# EAGLE board 2364_ROM-el_v2 (EAGLE 7.7.0)
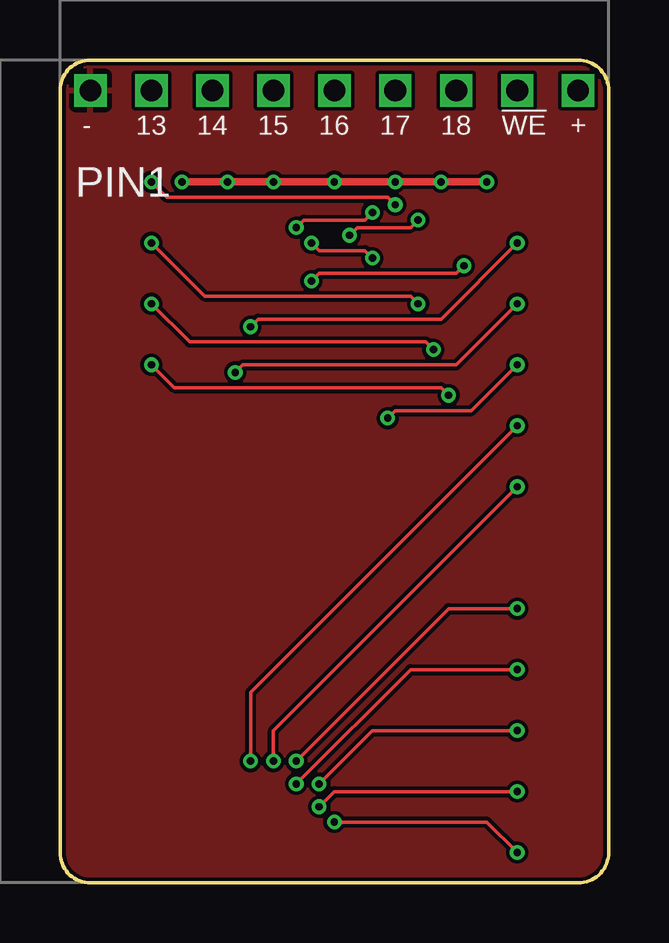
[diagram p0: board, top side]
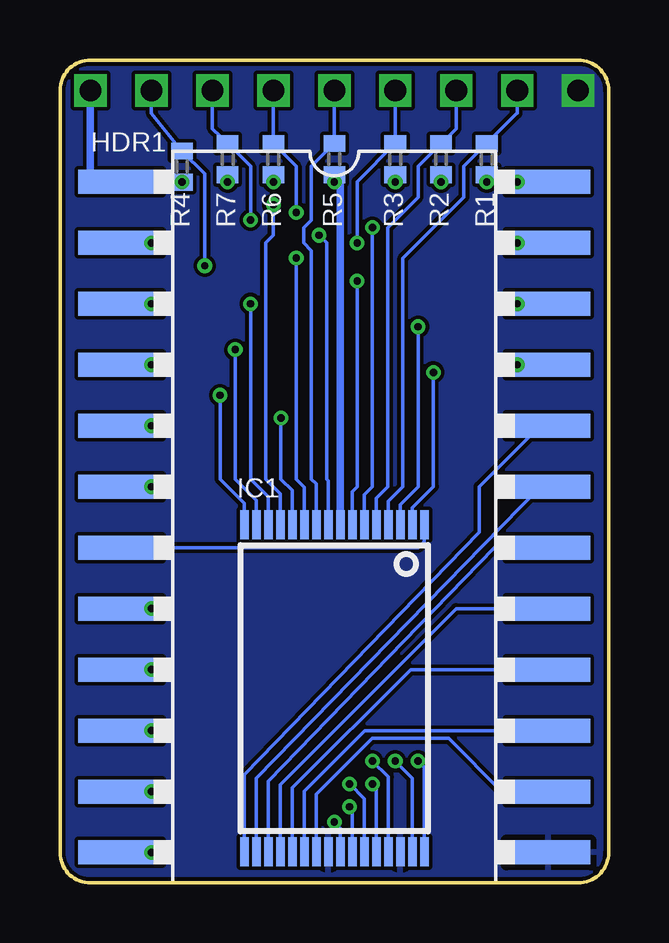
[diagram p1: board, bottom side, seen from below]

Size 22.86 x 34.29 mm. Coordinates in mm from the lower left corner, seen from the top.
Outline: 0,33.02 0,1.27 arc90 1.27,0 21.59,0 arc90 22.86,1.27 22.86,33.02 arc90 21.59,34.29 1.27,34.29 arc90 0,33.02
Copper layers (1*16): Top 0.035mm / dielectric 1.5mm / Bottom 0.035mm
Design rules "hackvana": minimum track width 6mil, minimum drill 0.3mm, track to track 6mil, track to pad 6mil, pad to pad 6mil, via to via 6mil, smd to smd 0mil, copper to edge 6mil, drill to drill 6mil, minimum pad ring 10mil, minimum via ring 6mil, stop-mask expansion 2mil, vias tented up to drill 100mil, thermal gap 10mil

## Footprints (pad centres in the part's own frame; a part is rotated, then mirrored left to right if it is on the bottom)
TP13SQ = smd 1.3 x 1.3: TP 0,0
DIL24-SMD-REVERSE = smd 1 x 3.5 bottom: 1 -13.97,-8.92; 2 -11.43,-8.92; 3 -8.89,-8.92; 4 -6.35,-8.92; 5 -3.81,-8.92; 6 -1.27,-8.92; 7 1.27,-8.92; 8 3.81,-8.92; 9 6.35,-8.92; 10 8.89,-8.92; 11 11.43,-8.92; 12 13.97,-8.92; 13 13.97,8.92; 14 11.43,8.92; 15 8.89,8.92; 16 6.35,8.92; 17 3.81,8.92; 18 1.27,8.92; 19 -1.27,8.92; 20 -3.81,8.92; 21 -6.35,8.92; 22 -8.89,8.92; 23 -11.43,8.92; 24 -13.97,8.92
VSOP32 = smd 1.2 x 0.36: 1 -7.31,3.75; 2 -7.31,3.25; 3 -7.31,2.75; 4 -7.31,2.25; 5 -7.31,1.75; 6 -7.31,1.25; 7 -7.31,0.75; 8 -7.31,0.25; 9 -7.31,-0.25; 10 -7.31,-0.75; 11 -7.31,-1.25; 12 -7.31,-1.75; 13 -7.31,-2.25; 14 -7.31,-2.75; 15 -7.31,-3.25; 16 -7.31,-3.75; 17 6.322,-3.75; 18 6.322,-3.25; 19 6.322,-2.75; 20 6.322,-2.25; 21 6.322,-1.75; 22 6.322,-1.25; 23 6.322,-0.75; 24 6.322,-0.25; 25 6.322,0.25; 26 6.322,0.75; 27 6.322,1.25; 28 6.322,1.75; 29 6.322,2.25; 30 6.322,2.75; 31 6.322,3.25; 32 6.322,3.75
R0402 = smd 0.7 x 0.9: 1 -0.65,0; 2 0.65,0

## Placement (x,y rotation side)
13  TPTP13SQ  [TP13SQ]  3.81,33.02 0 top
14  TPTP13SQ  [TP13SQ]  6.35,33.02 0 top
15  TPTP13SQ  [TP13SQ]  8.89,33.02 0 top
16  TPTP13SQ  [TP13SQ]  11.43,33.02 0 top
17  TPTP13SQ  [TP13SQ]  13.97,33.02 0 top
18  TPTP13SQ  [TP13SQ]  16.51,33.02 0 top
!WE  TPTP13SQ  [TP13SQ]  19.05,33.02 0 top
+  TPTP13SQ  [TP13SQ]  21.59,33.02 0 top
-  TPTP13SQ  [TP13SQ]  1.27,33.02 0 top
HDR1  2364-SB  [DIL24-SMD-REVERSE]  11.43,15.24 270 top
IC1  [VSOP32]  11.43,7.62 270 bottom
R1  [R0402]  5.08,30.16 270 bottom
R2  [R0402]  6.99,30.16 270 bottom
R3  [R0402]  8.89,30.16 270 bottom
R4  [R0402]  17.78,29.84 270 bottom
R5  [R0402]  11.43,30.16 270 bottom
R6  [R0402]  13.97,30.16 270 bottom
R7  [R0402]  15.88,30.16 270 bottom

## Library data of the parts
13-18 !WE + - = testpad
HDR1 = commodore
IC1 = memory-jedec
R1-R7 = resistor

## Nets
!WE: !WE.TP IC1.7 R4.1
A0: HDR1.8 IC1.20
A1: HDR1.7 IC1.19
A2: HDR1.6 IC1.18
A3: HDR1.5 IC1.17
A4: HDR1.4 IC1.16
A5: HDR1.3 IC1.15
A6: HDR1.2 IC1.14
A7: HDR1.1 IC1.13
A8: HDR1.23 IC1.3
A9: HDR1.22 IC1.2
A10: HDR1.19 IC1.31
A11: HDR1.18 IC1.1
A12: HDR1.21 IC1.12
A13: 13.TP IC1.4 R1.1
A14: 14.TP IC1.5 R2.1
A15: 15.TP IC1.11 R3.1
A16: 16.TP IC1.10 R5.1
A17: 17.TP IC1.6 R6.1
A18: 18.TP IC1.9 R7.1
D0: HDR1.9 IC1.21
D1: HDR1.10 IC1.22
D2: HDR1.11 IC1.23
D3: HDR1.13 IC1.25
D4: HDR1.14 IC1.26
D5: HDR1.15 IC1.27
D6: HDR1.16 IC1.28
D7: HDR1.17 IC1.29
GND: -.TP HDR1.12 IC1.24 IC1.30
N$1: HDR1.20 IC1.32
VCC: +.TP HDR1.24 IC1.8 R1.2 R2.2 R3.2 R4.2 R5.2 R6.2 R7.2

## Tracks (layer width: path | path; a pad name or v marks a point on that pad's centre or on a via)
!WE  (via drill 0.3, 0.9)
  Top 0.152: v10.48,25.08 10.8,25.4 16.51,25.4 v16.83,25.72
  Bottom 0.152: !WE.TP 19.05,32.07 R4.1 16.83,29.54 v16.83,25.72 | IC1.7 10.68,16.31 10.48,16.51 v10.48,25.08
  other vias: 19.05,33.02
A0
  Bottom 0.152: IC1.20 13.68,4.1 6.35,11.43 HDR1.8
A1
  Bottom 0.152: IC1.19 14.18,4.24 4.76,13.97 HDR1.7
A2
  Bottom 0.152: IC1.18 14.68,4.37 2.86,16.51 HDR1.6
A3
  Bottom 0.152: IC1.17 15.18,4.5 5.4,14.61 5.4,16.51 2.86,19.05 HDR1.5
A4  (via drill 0.3)
  Top 0.152: v3.81,21.59 4.76,20.64 15.88,20.64 v16.19,20.32
  Bottom 0.152: HDR1.4 v3.81,21.59 | IC1.16 15.18,15.81 16.19,16.83 v16.19,20.32
A5  (via drill 0.3)
  Top 0.152: v3.81,24.13 5.4,22.54 15.24,22.54 v15.56,22.23
  Bottom 0.152: HDR1.3 v3.81,24.13 | IC1.15 14.68,15.95 15.56,16.83 v15.56,22.23
A6  (via drill 0.3)
  Top 0.152: v3.81,26.67 6.03,24.45 14.61,24.45 v14.92,24.13
  Bottom 0.152: HDR1.2 v3.81,26.67 | IC1.14 14.18,16.09 14.92,16.83 v14.92,24.13
A7  (via drill 0.3)
  Top 0.152: v3.81,29.21 4.45,28.57 13.65,28.57 v13.97,28.26
  Bottom 0.152: HDR1.1 v3.81,29.21 | IC1.13 13.68,16.22 14.29,16.83 14.29,26.67 13.97,26.99 v13.97,28.26
A8  (via drill 0.3)
  Top 0.152: v19.05,26.67 15.88,23.5 8.25,23.5 v7.94,23.18
  Bottom 0.152: HDR1.23 v19.05,26.67 | IC1.3 8.68,15.77 7.94,16.51 v7.94,23.18
A9  (via drill 0.3)
  Top 0.152: v7.3,21.27 7.62,21.59 16.51,21.59 v19.05,24.13
  Bottom 0.152: HDR1.22 v19.05,24.13 | IC1.2 8.18,15.63 7.3,16.51 v7.3,21.27
A10  (via drill 0.3)
  Top 0.152: v8.89,5.08 8.89,6.35 v19.05,16.51
  Bottom 0.152: IC1.31 8.18,4.37 v8.89,5.08 | 19.68,16.51 HDR1.19 v19.05,16.51
A11
  Bottom 0.152: IC1.1 7.68,14.23 7.94,13.97 HDR1.18
A12  (via drill 0.3)
  Top 0.152: v13.65,19.37 13.97,19.68 17.14,19.68 v19.05,21.59
  Bottom 0.152: HDR1.21 v19.05,21.59 | IC1.12 13.18,16.36 13.65,16.83 v13.65,19.37
A13  (via drill 0.9)
  Bottom 0.152: 13.TP 3.81,32.07 3.83,32.07 R1.1 6.03,29.86 6.03,28.57 8.57,26.04 8.57,16.51 9.18,15.9 IC1.4
  other vias: 3.81,33.02
A14  (via drill 0.9)
  Bottom 0.152: 14.TP 6.35,31.43 R2.1 7.94,29.86 7.94,28.57 9.21,27.3 9.21,16.51 9.68,16.04 IC1.5
  other vias: 6.35,33.02
A15  (via drill 0.3, 0.9)
  Top 0.152: v10.48,26.67 10.8,26.35 12.7,26.35 v13.02,26.04
  Bottom 0.152: 15.TP R3.1 10.48,29.23 v10.48,26.67 | IC1.11 12.68,16.49 13.02,16.83 v13.02,26.04
  other vias: 8.89,33.02
A16  (via drill 0.9)
  Bottom 0.152: 16.TP R5.1 12.38,29.86 12.38,27.62 12.7,27.3 12.7,26.67 12.38,26.35 12.38,16.83 12.18,16.62 IC1.10
  other vias: 11.43,33.02
A17  (via drill 0.3, 0.9)
  Top 0.152: v9.84,27.3 10.16,27.62 12.7,27.62 v13.02,27.94
  Bottom 0.152: 17.TP R6.1 13.02,29.86 v13.02,27.94 | IC1.6 10.18,16.17 9.84,16.51 v9.84,27.3
  other vias: 13.97,33.02
A18  (via drill 0.3, 0.9)
  Top 0.152: v12.07,26.99 12.38,27.3 14.61,27.3 v14.92,27.62
  Bottom 0.152: 18.TP 16.51,31.43 R7.1 14.92,29.86 v14.92,27.62 | IC1.9 11.68,16.76 11.75,16.83 11.75,26.67 v12.07,26.99
  other vias: 16.51,33.02
D0
  Bottom 0.152: IC1.21 13.18,3.96 8.25,8.89 HDR1.9
D1
  Bottom 0.152: IC1.22 12.68,3.83 10.16,6.35 HDR1.10
D2
  Bottom 0.152: IC1.23 12.18,3.69 9.84,6.03 6.67,6.03 4.45,3.81 HDR1.11
D3  (via drill 0.3)
  Top 0.152: v19.05,1.27 17.78,2.54 v11.43,2.54
  Bottom 0.152: HDR1.13 v19.05,1.27 | IC1.25 11.18,2.29 v11.43,2.54
D4  (via drill 0.3)
  Top 0.152: v10.8,3.17 11.43,3.81 v19.05,3.81
  Bottom 0.152: IC1.26 10.68,3.06 v10.8,3.17 | v19.05,3.81 HDR1.14
D5  (via drill 0.3)
  Top 0.152: v10.8,4.13 13.02,6.35 v19.05,6.35
  Bottom 0.152: IC1.27 10.18,3.51 v10.8,4.13 | v19.05,6.35 HDR1.15
D6  (via drill 0.3)
  Top 0.152: v9.84,4.13 14.61,8.89 v19.05,8.89
  Bottom 0.152: IC1.28 9.68,3.96 v9.84,4.13 | v19.05,8.89 HDR1.16
D7  (via drill 0.3)
  Top 0.152: v9.84,5.08 16.19,11.43 v19.05,11.43
  Bottom 0.152: IC1.29 9.18,4.42 v9.84,5.08 | v19.05,11.43 HDR1.17
GND  (via drill 0.9)
  other vias: 1.27,33.02
  pour Top: 21.59,0 1.27,0 arc-90 0,1.27 0,33.02 arc-90 1.27,34.29 21.59,34.29 arc-90 22.86,33.02 22.86,1.27 arc-90
  pour Bottom: 21.59,0 1.27,0 arc-90 0,1.27 0,33.02 arc-90 1.27,34.29 21.59,34.29 arc-90 22.86,33.02 22.86,1.27 arc-90
N$1  (via drill 0.3)
  Top 0.152: v7.94,5.08 7.94,7.94 v19.05,19.05
  Bottom 0.152: IC1.32 7.68,4.82 v7.94,5.08 | v19.05,19.05 HDR1.20
VCC  (via drill 0.3, 0.9)
  Top 0.305: v5.08,29.21 v6.99,29.21 v8.89,29.21 v11.43,29.21 v13.97,29.21 v15.88,29.21 v17.78,29.21
  Bottom 0.152: R1.2 v5.08,29.21 | v6.99,29.21 R2.2 | R3.2 v8.89,29.21 | R5.2 v11.43,29.21 | R6.2 v13.97,29.21 | R7.2 v15.88,29.21 | R4.2 v17.78,29.21
  Bottom 0.305: v17.78,29.21 HDR1.24 21.59,29.21 +.TP | IC1.8 11.18,29.21 v11.43,29.21
  other vias: 21.59,33.02

## Text on the board
tNames: PIN1
tValues: ROM-el | www.go4retro.com | (c)2009-19 RETRO Innovations